# Altium PCB MCU.PcbDoc
Units mm, origin at the board's own origin, x right, y up, seen from the top; angles counter-clockwise.
Board outline 86.23 x 44.32 mm, 2 copper layers (Top Layer, Bottom Layer); 39 components, 73 nets, 241 pads, 41 vias.
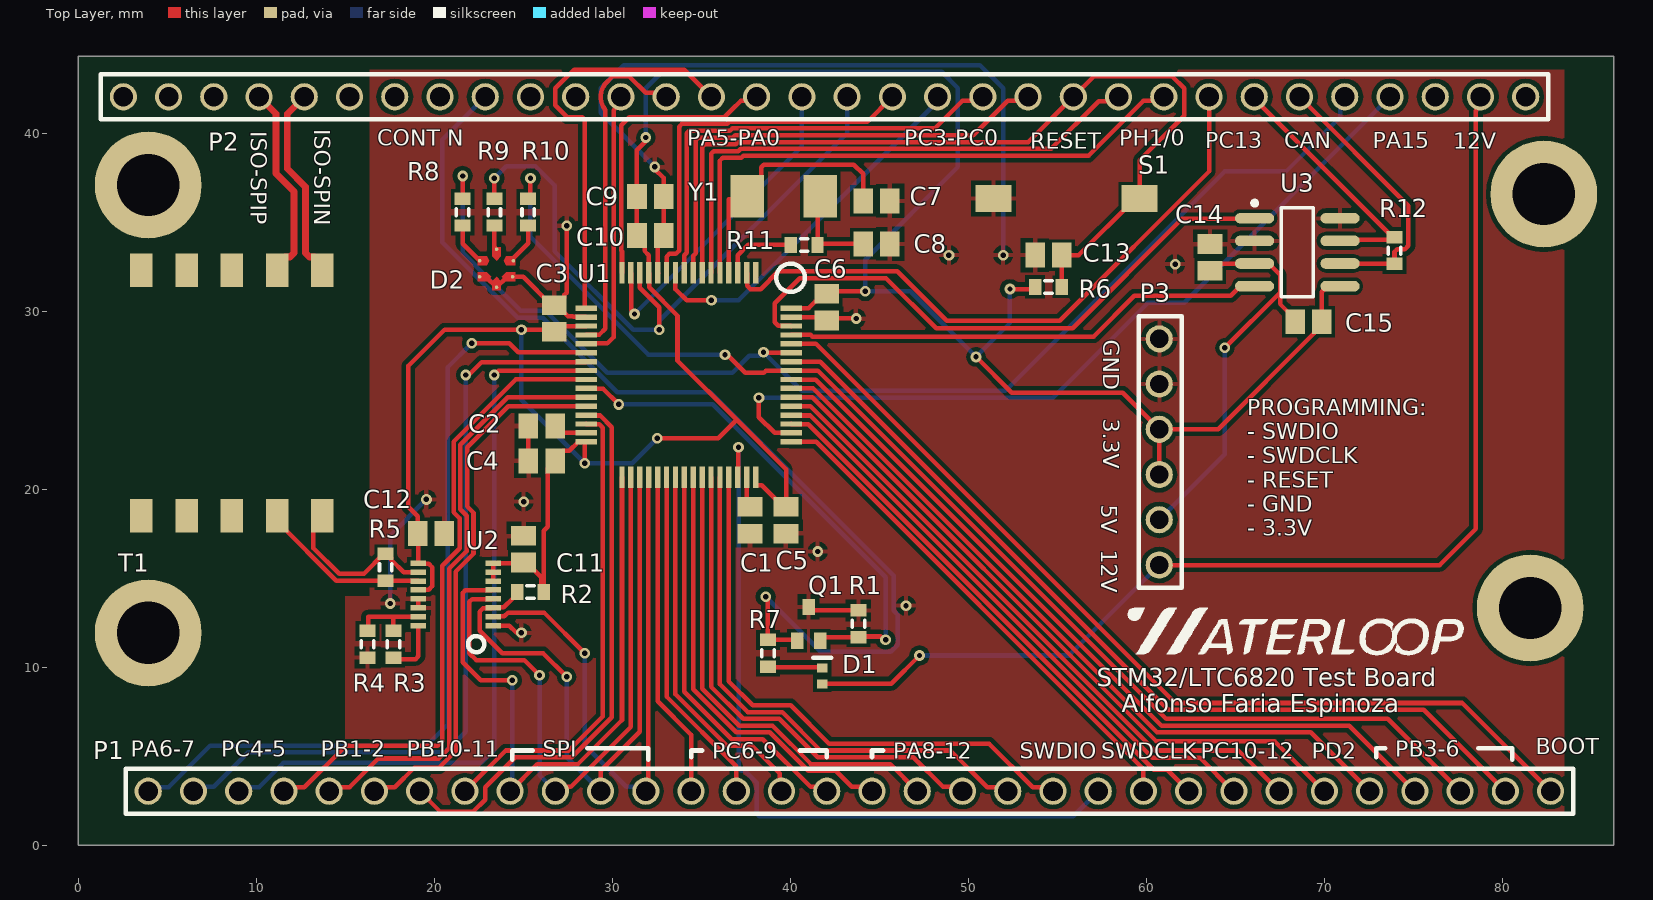
[diagram p0: Top Layer view]
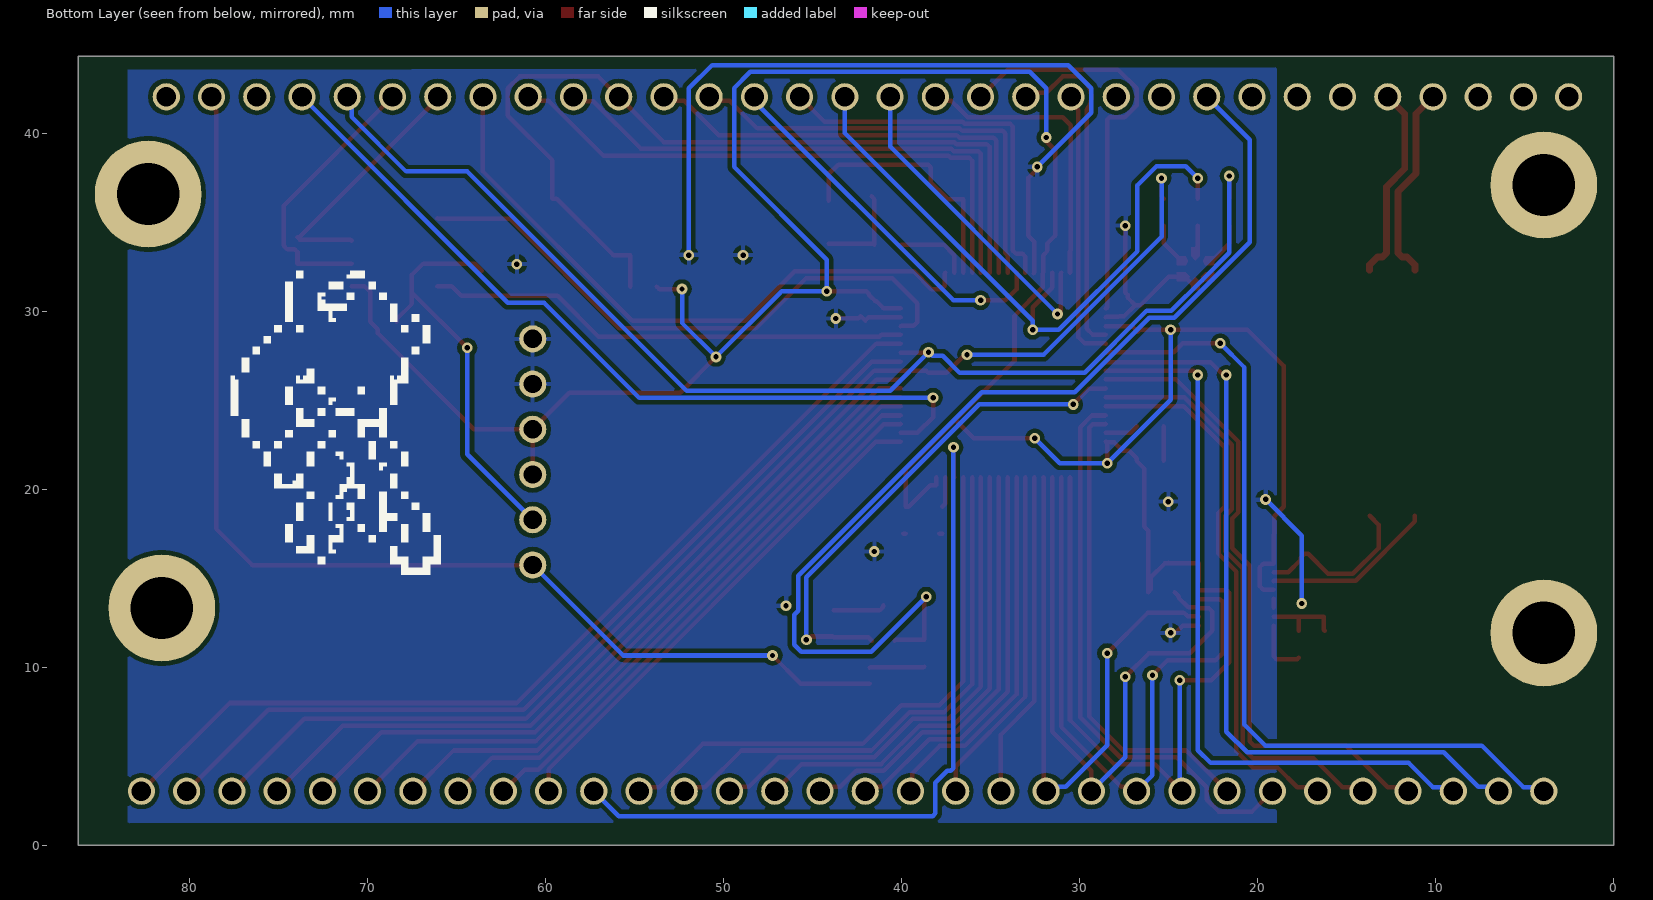
[diagram p1: Bottom Layer view, seen from below]

## Layer stack, top to bottom
Top Solder: solder mask 0.0102, Solder Resist, Dk 3.5
Top Layer: signal copper 0.0356
Dielectric 1: dielectric 0.32, FR-4, Dk 4.8
Bottom Layer: signal copper 0.0356
Bottom Solder: solder mask 0.0102, Solder Resist, Dk 3.5

## Board outline
0,0 86.233,0 86.233,44.323 41.021,44.323 0,44.323

## Design rules (kind name [scope] priority, off if disabled: settings)
Clearance [All] p1: gap=0.254 ignorepadtopadclearanceinfootprint=FALSE except(0: Arc-Hole Track-Hole SMDPad-Hole THPad-Hole Via-Hole Fill-Hole Poly-Hole Region-Hole Text-Hole; 0.127: Arc-Arc Arc-Track Track-Track SMDPad-SMDPad; 0.2: Arc-SMDPad Track-SMDPad SMDPad-Fill SMDPad-Poly SMDPad-Region)
DiffPairsRouting [All] p1: maxlimit=0.254 minlimit=0.254 mostfreqgap=0.254 toplayer_minwidth=0.381 toplayer_maxwidth=0.381 toplayer_prefwidth=0.381 bottomlayer_minwidth=0.381 bottomlayer_maxwidth=0.381 bottomlayer_prefwidth=0.381 maxuncoupledlength=12.7
PolygonConnect [All] p1: connectstyle=Relief reliefconductorwidth=0.254 reliefentries=4 polygonreliefangle="90 Angle" airgapwidth=0.254
RoutingVias [All] p1: holewidth=0.5 width=1 viastyle="Through Hole" minholewidth=0.2 minwidth=0.6 maxholewidth=0.711 maxwidth=1.27
SilkToSolderMaskClearance [IsPad] p1: minsilkscreentomaskgap=0.15 clearancetoexposedcopper=TRUE
SolderMaskExpansion [All] p1: expansion=0.102 istentingtop=FALSE
Width [All] p1: maxlimit=0.381 minlimit=0.254 preferedwidth=0.381 toplayer_prefwidth=0.254 minimp=50.000000 maximp=50.000000 favimp=50.000000
28 further rules are at their usual default settings.

## Classes and differential pairs
net class PH[0..1]: PH0 PH1
net class PC[0..15]: PC0 PC1 PC2 PC3 PC4 PC5 PC6 PC7 PC8 PC9 PC10 PC11 PC12 PC13 PC14 PC15
net class PB[1..11]: PB1 PB2 PB3 PB4 PB5 PB6 PB7 PB8 PB9 PB10 PB11
net class PA[0..15]: PA0 PA1 PA2 PA3 PA4 PA5 PA6 PA7 PA8 PA9 PA10 PA11 PA12 PA13 PA14 PA15
component class STM32: C1 C2 C3 C4 C5 C6 C7 C8 C9 C10 C14 C15 D2 R8 R9 R10 R11 R12 U1 Y1
component class SPI->ISO_SPI: C11 C12 R2 R3 R4 R5 T1 U2
component class "MOSFET Control": D1 Q1 R1 R7
component class Connectors: C13 P1 P2 P3 R6 S1
differential pair ISO-SPI: +ISO-SPI_P -ISO-SPI_N

## Components (designator, comment, footprint, x,y, rotation, side; value= is the part's Value field where it differs from the comment)
C1 "10V" C0805 37.719,18.26 r90 top value=2.2uF
C2 "10V" C0805 26.035,23.544 r0 top value=2.2uF
C3 "10V" C0805 26.734,29.591 r90 top value=100nF
C4 "10V" C0805 26.035,21.59 r180 top value=100nF
C5 "10V" C0805 39.751,18.26 r270 top value=100nF
C6 "10V" C0805 42.037,30.226 r270 top value=100nF
C7 "50V" C0805 44.831,36.195 r180 top value=4pF
C8 "50V" C0805 44.831,33.782 r180 top value=4pF
C9 "10V" C0805 32.131,36.449 r0 top value=10nF
C10 "10V" C0805 32.131,34.241 r180 top value=1uF
C11 "10V" C0805 25.019,16.637 r90 top value=10nF
C12 "10V" C0805 19.812,17.526 r0 top value=10nF
C13 "10V" C0805 54.483,33.147 r180 top value=100nF
C14 "10V" C0805 63.557,33.022 r90 top value=100nF
C15 "10V" C0805 69.088,29.407 r180 top value=100nF
D1 "SMLP13BC8TT86" SMLP13BC8TT86 41.783,9.525 r0 top
D2 "CL-340T-SD-T" CL-340T-SD-T 23.495,32.385 r0 top
P1 "61303211121" 61303211121 3.937,3.048 r0 top
P2 "61303211121" 61303211121 2.54,42.037 r0 top
P3 "PH1-06-UA" PH1-06-UA 60.706,28.448 r270 top
Q1 "NVS4409NT1G" NVS4409NT1G 41.021,12.446 r180 top
R1 "5%" J1-0603 43.815,12.446 r270 top value=10K
R2 "1%" J1-0603 25.4,14.224 r0 top value=3k
R3 "1%" J1-0603 17.703,11.303 r90 top value=3K
R4 "1%" J1-0603 16.248,11.303 r270 top value=1K
R5 "1%" J1-0603 17.272,15.621 r90 top value=120
R6 "5%" J1-0603 54.483,31.369 r180 top value=10K
R7 "5%" J1-0603 38.735,10.795 r270 top value=2K
R8 "1%" J1-0603 21.59,35.56 r90 top value=120R
R9 "1%" J1-0603 23.368,35.56 r90 top value=120R
R10 "1%" J1-0603 25.273,35.56 r90 top value=120R
R11 "0603" J1-0603 40.767,33.722 r0 top value=0
R12 "1%" J1-0603 73.914,33.401 r90 top value=120R
S1 "PTS636 SM43 SMTR LFS" "PTS636 SM43 SMTR LFS" 55.499,36.322 r180 top
T1 "HM2100NLT" HM2100NLT 8.636,25.4 r0 top
U1 "STM32F405RGT6TR" STM32F405RGT6TR 34.29,26.416 r180 top
U2 "LTC6820" LTC6820 21.209,14.097 r90 top
U3 "TJA1051T/3/CM,118" SO8_N 68.461,33.311 r0 top
Y1 "CX5032GB08000H0HPQZ1" CX5032GB08000H0HPQZ1 39.624,36.449 r180 top

## Footprints (in the part's own frame and the unit in brackets; to place one, negate y for a bottom-side part, rotate by r counter-clockwise, add the part's x,y. Pads: shape width x height; smd on the part's side, far side on the other; paste and mask are expansions set on the pad)
61303211121 [mil]
  round 60 hole 43.31: 1(0,0) 2(100,0) 3(200,0) 4(300,0) 5(400,0) 6(500,0) 7(600,0) 8(700,0) 9(800,0) 10(900,0) 11(1000,0) 12(1100,0) 13(1200,0) 14(1300,0) 15(1400,0) 16(1500,0) 17(1600,0) 18(1700,0) 19(1800,0) 20(1900,0) 21(2000,0) 22(2100,0) 23(2200,0) 24(2300,0) 25(2400,0) 26(2500,0) 27(2600,0) 28(2700,0) 29(2800,0) 30(2900,0) 31(3000,0) 32(3100,0)
  silkscreen extent -50,-50 3150,50
C0805 [mm] "Chip Capacitor, Body 2.0x1.3mm, IPC High Density"
  rect 1.1x1.4 smd: 1(-0.75,0) 2(0.75,0)
  body extent -1.1,-0.72 1.1,0.72, height 1.4
CL-340T-SD-T [mm]
  round 0.2 smd: 1(-0.95,0.45) 2(0,1.1) 3(0.95,0.45) 4(0.9,-0.45) 5(0,-1.05) 6(-0.95,-0.45)
  Top Layer region: 1.05,0.2 0.55,0.2 0.4,0.45 0.55,0.7 1.05,0.7
  Top Layer region: -1.05,0.7 -0.55,0.7 -0.4,0.45 -0.55,0.2 -1.05,0.2
  Top Layer region: 1.05,-0.7 0.55,-0.7 0.3,-0.45 0.55,-0.2 1.05,-0.2
  Top Layer region: -1.05,-0.2 -0.55,-0.2 -0.3,-0.45 -0.55,-0.7 -1.05,-0.7
  Top Layer region: -0.25,-1.2 -0.25,-0.7 0,-0.45 0.25,-0.7 0.25,-1.2
  Top Layer region: 0.25,1.2 0.25,0.7 0,0.45 -0.25,0.7 -0.25,1.2
  Top Layer region: 1.778,0
  Top Layer region: 1.143,0.254
  silkscreen extent -0.38,1.27 -0.38,1.27, body extent -0.75,-0.8 0.65,0.9, height 0.35
CX5032GB08000H0HPQZ1 [mm]
  rect 1.9x2.4 smd: 1(-2.05,0) 2(2.05,0)
  body extent -2.5,-1.6 2.5,1.6, height 1.1
HM2100NLT [mm]
  rect 1.27x1.89 smd: 1(-5.08,-6.895) 2(-2.54,-6.895) 3(0,-6.895) 4(2.54,-6.895) 5(5.08,-6.895) 6(5.08,6.895) 7(2.54,6.895) 8(0,6.895) 9(-2.54,6.895) 10(-5.08,6.895)
  body extent -7.37,-5.84 7.37,5.84, height 3.45
J1-0603 [mm] "Chip Resistor, Body 1.6x0.8mm, IPC High Density"
  rect 0.7x0.9 smd: 1(-0.75,0) 2(0.75,0)
  silkscreen extent -0.2,-0.35 0.2,0.35, body extent -0.85,-0.48 0.85,0.48, height 0.9
LTC6820 [mm]
  rect 0.305x0.889 smd: 1(-1.75,-2.106) 2(-1.25,-2.106) 3(-0.75,-2.106) 4(-0.25,-2.106) 5(0.25,-2.106) 6(0.75,-2.106) 7(1.25,-2.106) 8(1.75,-2.106) 9(1.75,2.106) 10(1.25,2.106) 11(0.75,2.106) 12(0.25,2.106) 13(-0.25,2.106) 14(-0.75,2.106) 15(-1.25,2.106) 16(-1.75,2.106)
  silkscreen extent -3.25,-1.6 -2.34,-0.69, body extent -2.03,-1.52 2.03,1.52, height 1.1
NVS4409NT1G [mm]
  rect 0.7x0.9 smd: 1(0.65,0.95) 2(-0.65,0.95) 3(0,-0.95)
  body extent -1.05,-0.62 1.05,0.62, height 0.9
PH1-06-UA [mil]
  round 60 hole 40.16: 1(0,0) 2(100,0) 3(200,0) 4(300,0) 5(400,0) 6(500,0)
  silkscreen extent -50,-45 550,50
"PTS636 SM43 SMTR LFS" [mm]
  rect 2x1.5 smd: 1(-4.1,0) 2(4.1,0)
  body extent -3,-1.75 3,2.85, height 4.3
SMLP13BC8TT86 [mm]
  rect 0.6x0.5 smd: 1(0,-0.45) 2(0,0.45)
  silkscreen extent -0.51,1.02 0.51,1.02, body extent -0.3,-0.5 0.3,0.5, height 0.2
SO8_N [mm] "SOIC, 8-Leads, Body 4.9x3.9mm, Pitch 1.27mm, IPC Medium Density"
  oval 2.2x0.6 smd: 1(-2.4,1.905) 2(-2.4,0.635) 3(-2.4,-0.635) 4(-2.4,-1.905) 5(2.4,-1.905) 6(2.4,-0.635) 7(2.4,0.635) 8(2.4,1.905)
  silkscreen extent -2.52,-2.5 0.9,2.88, body extent -2,-2.5 2,2.5, height 1.75
STM32F405RGT6TR [mm]
  rect 0.3x1.2 smd: 1(-3.75,-5.75) 2(-3.25,-5.75) 3(-2.75,-5.75) 4(-2.25,-5.75) 5(-1.75,-5.75) 6(-1.25,-5.75) 7(-0.75,-5.75) 8(-0.25,-5.75) 9(0.25,-5.75) 10(0.75,-5.75) 11(1.25,-5.75) 12(1.75,-5.75) 13(2.25,-5.75) 14(2.75,-5.75) 15(3.25,-5.75) 16(3.75,-5.75) 33(3.75,5.75) 34(3.25,5.75) 35(2.75,5.75) 36(2.25,5.75) 37(1.75,5.75) 38(1.25,5.75) 39(0.75,5.75) 40(0.25,5.75) 41(-0.25,5.75) 42(-0.75,5.75) 43(-1.25,5.75) 44(-1.75,5.75) 45(-2.25,5.75) 46(-2.75,5.75) 47(-3.25,5.75) 48(-3.75,5.75)
  rect 1.2x0.3 smd: 17(5.75,-3.75) 18(5.75,-3.25) 19(5.75,-2.75) 20(5.75,-2.25) 21(5.75,-1.75) 22(5.75,-1.25) 23(5.75,-0.75) 24(5.75,-0.25) 25(5.75,0.25) 26(5.75,0.75) 27(5.75,1.25) 28(5.75,1.75) 29(5.75,2.25) 30(5.75,2.75) 31(5.75,3.25) 32(5.75,3.75) 49(-5.75,3.75) 50(-5.75,3.25) 51(-5.75,2.75) 52(-5.75,2.25) 53(-5.75,1.75) 54(-5.75,1.25) 55(-5.75,0.75) 56(-5.75,0.25) 57(-5.75,-0.25) 58(-5.75,-0.75) 59(-5.75,-1.25) 60(-5.75,-1.75) 61(-5.75,-2.25) 62(-5.75,-2.75) 63(-5.75,-3.25) 64(-5.75,-3.75)
  silkscreen extent -6.52,-6.26 -4.92,-4.66, body extent -4.83,-4.89 4.83,4.89, height 1.6

## Part data
C1 C2: library part Cap, "C0805C225K8RACAUTO. 2.2µF ±10% 10V Ceramic Capacitor X7R 0805 (2012 Metric)", LatestRevisionDate=17-Jul-2002, LatestRevisionNote="Re-released for DXP Platform.", PackageDescription="Radial Cap, Thru-Hole; 2 Leads; 0.3 in Pin Spacing", PackageReference=RAD-0.3, Published=8-Jun-2000, Publisher="Altium Limited"
C3 C4 C5 C6 C13 C14 C15: library part Cap, "C0805C104K8RACTU. 0.1µF ±10% 10V Ceramic Capacitor X7R 0805 (2012 Metric)", LatestRevisionDate=17-Jul-2002, LatestRevisionNote="Re-released for DXP Platform.", PackageDescription="Radial Cap, Thru-Hole; 2 Leads; 0.3 in Pin Spacing", PackageReference=RAD-0.3, Published=8-Jun-2000, Publisher="Altium Limited"
C7: library part Cap, "CBR08C409B5GAC. 4pF ±0.1pF 50V Ceramic Capacitor C0G, NP0 0805 (2012 Metric)", LatestRevisionDate=17-Jul-2002, LatestRevisionNote="Re-released for DXP Platform.", PackageDescription="Radial Cap, Thru-Hole; 2 Leads; 0.3 in Pin Spacing", PackageReference=RAD-0.3, Published=8-Jun-2000, Publisher="Altium Limited"
C8: library part Cap, "CBR08C409B5GAC", LatestRevisionDate=17-Jul-2002, LatestRevisionNote="Re-released for DXP Platform.", PackageDescription="Radial Cap, Thru-Hole; 2 Leads; 0.3 in Pin Spacing", PackageReference=RAD-0.3, Published=8-Jun-2000, Publisher="Altium Limited"
C9 C11 C12: library part Cap, "C0805C103K8RAC7800. 10000pF ±10% 10V Ceramic Capacitor X7R 0805 (2012 Metric)", LatestRevisionDate=17-Jul-2002, LatestRevisionNote="Re-released for DXP Platform.", PackageDescription="Radial Cap, Thru-Hole; 2 Leads; 0.3 in Pin Spacing", PackageReference=RAD-0.3, Published=8-Jun-2000, Publisher="Altium Limited"
C10: library part Cap, "CL21B105KPFNNNE. 1µF ±10% 10V Ceramic Capacitor X7R 0805 (2012 Metric)", LatestRevisionDate=17-Jul-2002, LatestRevisionNote="Re-released for DXP Platform.", PackageDescription="Radial Cap, Thru-Hole; 2 Leads; 0.3 in Pin Spacing", PackageReference=RAD-0.3, Published=8-Jun-2000, Publisher="Altium Limited"
D1: library part LED2, "Blue 470nm LED Indication - Discrete 2.9V 2-SMD, No Lead", LatestRevisionDate=17-Jul-2002, LatestRevisionNote="Re-released for DXP Platform.", PackageDescription="SM LED; 2 Flat Leads", PackageReference=3.2X1.6X1.1, PackageVersion=Feb-2002, Published=8-Jun-2000, Publisher="Altium Limited"
P3: library part "Header 6", "Connector Header Through Hole 6 position 0.100\" (2.54mm)", LatestRevisionDate=17-Jul-2002, LatestRevisionNote="Re-released for DXP Platform.", Publisher="Altium Limited"
Q1: library part MOSFET-N, "N-Channel 25V 700mA (Ta) 280mW (Tj) Surface Mount SC-70-3 (SOT323)", LatestRevisionDate=17-Jul-2002, LatestRevisionNote="Re-released for DXP Platform.", PackageDescription="TO, Flat Index; 3 In-Line, Axial Leads; Body Dia. 4.6mm; Lead Dia. 0.5 mm (max)", PackageReference=E3, PackageVersion=1995/1996, Published=8-Jun-2000, Publisher="Altium Limited"
R1 R6: library part Res1, "ERJ-3GEYJ103V. 10 kOhms ±5% 0.1W, 1/10W Chip Resistor 0603 (1608 Metric) Automotive AEC-Q200 Thick Film", LatestRevisionDate=17-Jul-2002, LatestRevisionNote="Re-released for DXP Platform.", PackageDescription="Axial Device, Thru-Hole; 2 Leads; 0.3 in Pin Spacing", PackageReference=AXIAL-0.3, Published=8-Jun-2000, Publisher="Altium Limited"
R2 R3: library part Res1, "RMCF0603FT3K00. 3 kOhms ±1% 0.1W, 1/10W Chip Resistor 0603 (1608 Metric) Automotive AEC-Q200 Thick Film", LatestRevisionDate=17-Jul-2002, LatestRevisionNote="Re-released for DXP Platform.", PackageDescription="Axial Device, Thru-Hole; 2 Leads; 0.3 in Pin Spacing", PackageReference=AXIAL-0.3, Published=8-Jun-2000, Publisher="Altium Limited"
R4: library part Res1, "RC0603FR-071KL .1 kOhms ±1% 0.1W, 1/10W Chip Resistor 0603 (1608 Metric) Moisture Resistant Thick Film", LatestRevisionDate=17-Jul-2002, LatestRevisionNote="Re-released for DXP Platform.", PackageDescription="Axial Device, Thru-Hole; 2 Leads; 0.3 in Pin Spacing", PackageReference=AXIAL-0.3, Published=8-Jun-2000, Publisher="Altium Limited"
R5 R8 R9 R10 R12: library part Res1, "RC0603FR-07120RL. 120 Ohms ±1% 0.1W, 1/10W Chip Resistor 0603 (1608 Metric) Moisture Resistant Thick Film", LatestRevisionDate=17-Jul-2002, LatestRevisionNote="Re-released for DXP Platform.", PackageDescription="Axial Device, Thru-Hole; 2 Leads; 0.3 in Pin Spacing", PackageReference=AXIAL-0.3, Published=8-Jun-2000, Publisher="Altium Limited"
R7: library part Res1, "ERJ-PA3J202V. 2 kOhms ±5% 0.25W, 1/4W Chip Resistor 0603 (1608 Metric) Automotive AEC-Q200, Pulse Withstanding Thick Film", LatestRevisionDate=17-Jul-2002, LatestRevisionNote="Re-released for DXP Platform.", PackageDescription="Axial Device, Thru-Hole; 2 Leads; 0.3 in Pin Spacing", PackageReference=AXIAL-0.3, Published=8-Jun-2000, Publisher="Altium Limited"
R11: library part Res1, "ERJ-U030R00V. 0 Ohms Jumper 0.1W, 1/10W Chip Resistor 0603 (1608 Metric) Anti-Sulfur, Automotive AEC-Q200 Thick Film", LatestRevisionDate=17-Jul-2002, LatestRevisionNote="Re-released for DXP Platform.", PackageDescription="Axial Device, Thru-Hole; 2 Leads; 0.3 in Pin Spacing", PackageReference=AXIAL-0.3, Published=8-Jun-2000, Publisher="Altium Limited"
S1: library part SW-PB, "Tactile Switch SPST-NO Top Actuated Surface Mount", LatestRevisionDate=17-Jul-2002, LatestRevisionNote="Re-released for DXP Platform.", PackageDescription="Switch; 2 Leads", PackageReference=SPST-2, Published=24-Mar-1999, Publisher="Altium Limited"
U3: library part TJA1050T/CM,118
Y1: library part XTAL, "8MHz ±20ppm Crystal 12pF 300 Ohms 2-SMD, No Lead", LatestRevisionDate=17-Jul-2002, LatestRevisionNote="Re-released for DXP Platform.", PackageDescription="Crystal, Thru-Hole; 2 Leads; Body 3.1 x 8.2 mm (Dia.xH)", PackageReference=R38, Published=8-Jun-2000, Publisher="Altium Limited"

## Free pads (board coordinates)
  round 6 hole 3.5 unplated: 12(3.937,37.084) 13(3.937,11.938) 14(82.296,36.576) 15(81.534,13.335)

## Via types
v1: diameter 0.6, hole 0.3, Top Layer to Bottom Layer, 41 vias

## Nets (pads, with @x,y where several pads share a name; then routed paths per layer and width w, separated by ;. In a path a pad name is that pad's centre, name@x,y a point inside that pad or via, vN(x,y) a via of type N, cw(c..) or ccw(c..) an arc to the next point about the centre after c; other vN are vias at no path point)
3V3: C3.1 C4.1 C5.1 C6.1 C9.1 C10.2 C11.1 C12.1 C15.1 P3.3 P3.4 R2.2 R6.2 U1.13 U1.19 U1.32 U1.48 U1.64 U2.6 U2.7 U2.8 U2.9 U2.12 U3.5 | length 169
  Top Layer w0.254: U2.12 19.123,14.367 19.683,14.367 19.874,14.559 19.874,15.635 19.683,15.827 19.123,15.827 U2.9 19.103,17.485 C12.1 19.062,18.49 18.542,19.01 18.542,26.924 20.574,28.956 v1(24.892,28.956) 26.619,28.956 C3.1 27.059,29.166 U1.19 ; U2.6 U2.7 U2.8 C11.1@25.209,15.847 ; C11.1 25.059,15.847 C11.1@25.209,15.847 ; v1(28.448,21.463) 28.448,22.643 U1.32@28.471,22.666 ; U1.32 28.517,22.643 28.067,22.643 27.587,22.163 27.208,22.163 26.785,21.74 C4.1 26.362,21.167 26.362,17.888 26.15,17.676 R2.2 26.001,14.373 26.001,15.055 C11.1@25.209,15.847 ; v1(31.877,39.751) 31.877,39.549 31.369,39.041 31.369,37.679 31.381,37.667 C9.1 C10.2 31.804,33.818 31.804,33.383 32.04,33.147 U1.13 32.063,32.143 32.063,31.341 33.655,29.749 33.655,27.218 36.977,23.896 ; v1(32.512,22.86) 35.941,22.86 36.977,23.896 ; U1.48 38.04,20.251 38.063,20.228 38.383,20.228 39.601,19.01 C5.1 39.751,21.122 36.977,23.896 ; U1.64 41.015,30.166 41.402,30.553 41.464,30.553 41.837,30.926 41.837,30.988 41.964,31.115 v1(44.196,31.115) ; v1(50.419,27.432) 52.427,25.424 58.65,25.424 P3.3 ; v1(52.324,31.242) 53.606,31.242 R6.2 ; P3.4 P3.3 ; U3.5 70.155,31.406 69.838,31.089 C15.1 69.415,28.984 69.415,28.771 64.012,23.368 P3.3
  Bottom Layer w0.254: v1(24.892,28.956) 24.892,25.019 v1(28.448,21.463) 31.115,21.463 v1(32.512,22.86) ; v1(31.877,39.751) 31.877,42.51 32.801,43.434 48.492,43.434 49.403,42.523 49.403,38.1 44.196,32.893 v1(44.196,31.115) 46.736,31.115 46.863,30.988 v1(50.419,27.432) 52.324,29.337 v1(52.324,31.242)
5V: C14.1 C15.2 P3.5 U3.3 | length 23.1
  Top Layer w0.254: C14.1 63.961,32.676 U3.3 66.861,32.676 67.488,32.049 67.488,31.039 ; v1(64.389,27.94) 67.488,31.039 ; C15.2 68.338,29.557 67.488,30.407 67.488,31.039
  Bottom Layer w0.254: P3.5 60.96,18.288 60.96,18.542 64.389,21.971 v1(64.389,27.94)
12V: D1.1 P2.31 P3.6 | length 64.7
  Top Layer w0.254: D1.1 45.651,9.075 v1(47.244,10.668) ; P3.6 76.454,15.748 78.486,17.78 78.486,41.253 78.497,41.264 78.497,41.794 P2.31
  Bottom Layer w0.254: v1(47.244,10.668) 55.626,10.668 P3.6
BOOT: P1.32 U1.60 | length 53
  Top Layer w0.254: U1.60 41.43,28.166 61.595,8.001 77.724,8.001 P1.32
CAN_RX: U1.61 U3.4 | length 27.2
  Top Layer w0.254: U1.61 41.135,28.666 41.226,28.575 57.023,28.575 59.309,30.861 64.716,30.861 65.261,31.406 U3.4
CAN_TX: U1.62 U3.1 | length 33.3
  Top Layer w0.254: U1.62 40.017,29.189 39.305,29.189 39.113,29.381 39.113,30.451 40.515,31.853 45.363,31.853 48.174,29.042 55.839,29.042 61.976,35.179 66.024,35.179 U3.1
CONT_N: P2.9 Q1.1 R7.1 | length 59.2
  Top Layer w0.254: v1(38.608,13.97) 38.608,13.876 38.735,13.749 R7.1 40.322,11.545 Q1.1
  Bottom Layer w0.254: P2.9 20.447,39.624 20.447,33.878 24.688,29.637 26.085,29.637 30.276,25.446 35.492,25.446 45.801,15.137 45.801,13.18 46.02,12.961 46.02,11.275 45.621,10.876 41.702,10.876 v1(38.608,13.97)
GND: C1.1 C2.1 C3.2 C4.2 C5.2 C6.2 C7.1 C8.1 C9.2 C10.1 C11.2 C12.2 C13.2 C14.2 D2.4 D2.5 D2.6 P3.1 P3.2 Q1.3 R1.1 R4.2 S1.2 U1.12 U1.18 U1.63 U2.1 U2.13 U2.14 U3.2 U3.8 | length 75.2
  Top Layer w0.254: U2.14 U2.13 ; D2.6 22.895,31.935 D2.5 24.095,31.935 D2.4 24.99,31.935 26.584,30.341 C3.2 C3.2@26.884,30.341 ; U2.1 24.208,12.347 24.617,11.938 v1(24.892,11.938) ; C4.2 C2.1 ; v1(27.432,34.798) 27.432,31.039 27.307,30.914 27.307,30.764 C3.2@26.884,30.341 ; U1.18 28.517,29.689 27.805,29.689 27.776,29.718 27.507,29.718 C3.2@26.884,30.341 ; v1(32.385,38.1) 32.385,37.978 32.881,37.482 C9.2 C10.1 32.54,33.9 U1.12 U1.12@32.563,32.143 ; C1.1 C1.1@37.869,17.51 ; C5.2 C5.2@39.901,17.51 ; U1.63 41.847,29.666 C6.2 42.279,29.718 42.406,29.591 v1(43.688,29.591) ; Q1.3@41.021,13.496 Q1.3 41.221,13.196 R1.1
  Bottom Layer w0.254: v1(17.526,13.589) 17.526,17.399 v1(19.558,19.431) ; v1(32.385,38.1) 29.337,41.148 29.337,42.51 30.642,43.815 50.638,43.815 51.943,42.51 v1(51.943,33.147)
  other v1: 46.482,13.462 41.529,16.51 25.019,19.304 61.595,32.639 48.895,33.147
ISO-SPI_N: P2.5 T1.6 | length 11.1
  Top Layer w0.381: P2.5 11.747,41.084 11.747,37.997 12.763,36.981 12.763,33.273 12.987,33.049 13.271,33.049 13.716,32.605 T1.6
ISO-SPI_P: P2.4 T1.7 | length 11.1
  Top Layer w0.381: P2.4 11.112,41.084 11.112,37.734 12.128,36.718 12.128,33.273 11.905,33.049 11.62,33.049 11.176,32.605 T1.7
NetC1_2: C1.2 U1.47 | length 1.7
  Top Layer w0.254: U1.47 37.54,19.189 C1.2
NetC2_2: C2.2 U1.31 | length 1.9
  Top Layer w0.254: C2.2 27.163,23.166 U1.31
NetC7_2: C7.2 U1.4 Y1.2 | length 14.7
  Top Layer w0.254: U1.4 36.54,36.286 37.411,36.286 Y1.2 38.354,37.229 38.354,38.078 38.503,38.227 43.561,38.227 44.081,37.707 C7.2
NetC8_2: C8.2 R11.2 Y1.1 | length 5.4
  Top Layer w0.254: Y1.1 41.517,36.292 R11.2 41.577,33.782 C8.2
NetC13_1: C13.1 P2.22 R6.1 S1.1 U1.7 | length 50.7
  Top Layer w0.254: U1.7 35.04,33.071 35.052,33.083 35.052,39.221 35.201,39.37 36.917,39.37 37.044,39.497 53.34,39.497 P2.22 57.023,43.18 61.433,43.18 62.103,42.51 62.103,40.98 59.599,38.476 S1.1 59.349,36.322 56.174,33.147 C13.1 R6.1
NetD1_2: D1.2 R7.2 | length 3.1
  Top Layer w0.254: R7.2 38.77,10.01 41.748,10.01 D1.2
NetD2_1: D2.1 R8.1 | length 2.4
  Top Layer w0.254: R8.1 21.59,33.79 D2.1
NetD2_2: D2.2 R9.1 | length 1.4
  Top Layer w0.254: R9.1 23.368,33.612 D2.2
NetD2_3: D2.3 R10.1 | length 2.3
  Top Layer w0.254: 24.37,32.91 25.273,33.813 R10.1
NetP1_9: P1.9 U1.33 U2.5 | length 36.8
  Top Layer w0.254: U2.5 23.295,14.327 21.739,14.327 21.59,14.178 21.59,10.287 22.606,9.271 v1(24.384,9.271) ; P1.9 25.781,4.572 28.067,4.572 30.54,7.045 U1.33
  Bottom Layer w0.254: P1.9 24.13,3.175 24.384,3.429 v1(24.384,9.271)
NetP1_10: P1.10 U1.34 U2.4 | length 35.4
  Top Layer w0.254: U2.4 23.295,13.827 22.12,13.827 21.971,13.678 21.971,10.795 22.352,10.414 25.045,10.414 v1(25.908,9.551) ; P1.10 27.034,3.285 27.669,3.285 31.04,6.656 U1.34
  Bottom Layer w0.254: v1(25.908,9.551) 25.908,3.937 P1.10
NetP1_11: P1.11 R2.1 U1.35 U2.3 | length 35.4
  Top Layer w0.254: R2.1 24.427,14.001 24.427,13.9 23.895,13.367 23.336,13.367 U2.3 23.295,13.327 22.735,13.327 22.544,13.135 22.544,12.059 23.808,10.795 26.105,10.795 v1(27.432,9.468) ; P1.11 29.337,4.191 31.54,6.394 U1.35
  Bottom Layer w0.254: v1(27.432,9.468) 27.432,4.953 P1.11
NetP1_12: P1.12 U1.36 U2.2 | length 33.5
  Top Layer w0.254: U2.2 23.335,12.867 23.934,12.867 24.147,13.081 26.162,13.081 v1(28.448,10.795) ; P1.12 32.017,3.188 32.017,20.643 U1.36
  Bottom Layer w0.254: v1(28.448,10.795) 28.448,5.625 30.782,3.291 31.634,3.291 P1.12
NetQ1_2: Q1.2 R1.2 U1.26 | length 28.5
  Top Layer w0.254: U1.26 28.563,25.643 29.475,25.643 v1(30.353,24.765) ; Q1.2 41.871,11.696 R1.2 43.854,11.735 45.068,11.735 45.245,11.557 v1(45.339,11.557)
  Bottom Layer w0.254: v1(30.353,24.765) 35.634,24.765 45.339,15.06 v1(45.339,11.557)
NetR3_1: R3.1 U2.16 | length 3.2
  Top Layer w0.254: R3.1 17.789,10.467 18.954,10.467 19.103,10.616 U2.16
NetR3_2: R3.2 R4.1 U2.15 | length 4.4
  Top Layer w0.254: R4.1 16.298,12.102 16.298,12.847 17.7,12.847 ; R3.2 17.7,12.055 17.7,12.847 ; U2.15 17.7,12.847
NetR5_1: R5.1 T1.4 U2.11 | length 9.6
  Top Layer w0.254: T1.4 11.176,18.195 14.5,14.871 R5.1 17.284,14.859 19.091,14.859 U2.11
NetR5_2: R5.2 T1.5 U2.10 | length 9.4
  Top Layer w0.254: T1.5 13.208,17.997 13.208,16.702 14.658,15.252 16.053,15.252 17.172,16.371 R5.2 ; R5.2@17.372,16.371 17.595,16.148 17.595,16.03 18.277,15.347 U2.10
NetR11_1: R11.1 U1.3 | length 4.2
  Top Layer w0.254: U1.3 37.04,33.147 37.615,33.722 R11.1
PA0: P2.17 R9.2 U1.14 | length 37.8
  Top Layer w0.254: R9.2 v1(23.368,37.465) ; U1.14 31.54,31.325 32.639,30.226 v1(32.639,28.956)
  Bottom Layer w0.254: v1(23.368,37.465) 24.049,38.146 25.682,38.146 26.751,37.077 26.751,33.373 31.168,28.956 v1(32.639,28.956) 32.639,29.464 43.18,40.005 P2.17
PA1: P2.16 U1.15 | length 18.5
  Top Layer w0.254: U1.15 31.063,32.143 31.063,30.024 v1(31.242,29.845)
  Bottom Layer w0.254: v1(31.242,29.845) 40.64,39.243 P2.16
PA2: P2.15 U1.16 | length 16.5
  Top Layer w0.254: U1.16 30.54,33.369 30.504,33.405 30.504,40.445 30.953,40.894 36.286,40.894 36.667,41.275 36.676,41.275 37.218,41.818 37.881,41.818 P2.15
PA3: P2.14 U1.17 | length 23.4
  Top Layer w0.254: U1.17 28.471,30.166 28.448,30.189 28.448,40.745 28.299,40.894 27.467,40.894 26.797,41.564 26.797,42.51 27.848,43.561 34.036,43.561 P2.14
PA4: P2.13 U1.20 | length 19.1
  Top Layer w0.254: U1.20 28.563,28.689 29.275,28.689 29.591,29.005 29.591,41.319 cw(c30.48,42.037) 29.591,42.755 29.591,42.764 30.007,43.18 30.953,43.18 31.877,42.256 32.801,42.256 P2.13
PA5: P2.12 U1.21 | length 15.3
  Top Layer w0.254: U1.21 28.563,28.189 29.713,28.189 30.063,28.539 30.063,41.276 30.48,41.693 P2.12
PA6: P1.1 U1.22 | length 47
  Top Layer w0.254: v1(22.098,28.194) 24.212,28.194 24.72,27.686 28.52,27.686 U1.22
  Bottom Layer w0.254: P1.1 4.156,3.267 5.08,3.267 7.422,5.61 19.58,5.61 20.745,6.775 20.745,26.841 v1(22.098,28.194)
PA7: P1.2 U1.23 | length 43.8
  Top Layer w0.254: v1(21.761,26.416) 21.931,26.416 22.658,27.143 28.517,27.143 U1.23
  Bottom Layer w0.254: P1.2 6.72,3.291 7.609,3.291 9.547,5.229 20.596,5.229 21.761,6.394 v1(21.761,26.416)
PA8: P1.17 U1.41 | length 24.3
  Top Layer w0.254: U1.41 34.54,8.767 36.957,6.35 38.831,6.35 40.99,4.191 42.545,4.191 43.445,3.291 44.334,3.291 P1.17
PA9: P1.18 U1.42 | length 26.3
  Top Layer w0.254: U1.42 35.04,8.806 37.115,6.731 38.989,6.731 41.148,4.572 45.593,4.572 P1.18
PA10: P1.19 U1.43 | length 28.3
  Top Layer w0.254: U1.43 35.54,8.91 37.338,7.112 39.37,7.112 41.529,4.953 46.9,4.953 48.562,3.291 49.414,3.291 P1.19
PA11: P1.20 U1.44 | length 30.3
  Top Layer w0.254: U1.44 36.04,9.045 37.592,7.493 39.528,7.493 41.687,5.334 48.987,5.334 51.054,3.267 51.978,3.267 P1.20
PA12: P1.21 U1.45 | length 32.2
  Top Layer w0.254: U1.45 36.54,9.211 37.877,7.874 40.005,7.874 42.164,5.715 51.146,5.715 53.594,3.267 54.518,3.267 P1.21
PA13: P1.22 U1.46 | length 42.6
  Top Layer w0.254: U1.46 37.062,20.688 37.062,22.33 v1(37.084,22.352)
  Bottom Layer w0.254: v1(37.084,22.352) 37.084,4.34 37.233,4.191 37.43,4.191 38.1,3.521 38.1,1.8 38.249,1.651 55.88,1.651 P1.22
PA14: P1.23 U1.49 | length 28.6
  Top Layer w0.254: U1.49 41.438,22.666 59.817,4.287 P1.23
PA15: P2.29 U1.50 | length 45.7
  Top Layer w0.254: v1(38.227,25.146) 38.227,24.049 39.11,23.166 U1.50
  Bottom Layer w0.254: v1(38.227,25.146) 54.737,25.146 60.071,30.48 62.103,30.48 P2.29
PB1: P1.5 U1.27 | length 33.5
  Top Layer w0.254: P1.5 14.316,3.267 15.24,3.267 16.857,4.884 20.251,4.884 20.828,5.461 20.828,15.541 21.82,16.533 21.82,18.519 21.463,18.876 21.463,22.51 24.119,25.166 U1.27
PB2: P1.6 U1.28 | length 30.8
  Top Layer w0.254: P1.6 16.856,3.267 17.78,3.267 18.889,4.376 20.282,4.376 21.209,5.303 21.209,15.383 22.201,16.375 22.201,18.677 21.844,19.034 21.844,22.352 24.158,24.666 U1.28
PB3: P1.28 U1.55 | length 41.8
  Top Layer w0.254: U1.55 41.263,25.666 60.579,6.35 69.215,6.35 P1.28
PB4: P1.29 U1.56 | length 44.6
  Top Layer w0.254: U1.56 40.063,26.143 41.421,26.143 60.833,6.731 71.374,6.731 P1.29
PB5: P1.30 R10.2 U1.57 | length 69.7
  Top Layer w0.254: R10.2 25.4,36.437 v1(25.4,37.465) ; v1(36.322,27.559) 36.449,27.559 37.465,26.543 38.498,26.543 38.621,26.666 U1.57 41.533,26.666 61.087,7.112 73.533,7.112 P1.30
  Bottom Layer w0.254: v1(25.4,37.465) 25.4,34.185 32.026,27.559 v1(36.322,27.559)
PB6: P1.31 U1.58 | length 50.1
  Top Layer w0.254: U1.58 41.668,27.166 61.214,7.62 75.565,7.62 P1.31
PB7: P2.28 R8.2 U1.59 | length 68.2
  Top Layer w0.254: R8.2 v1(21.59,37.592) ; v1@38.481,27.643 38.514,27.676 40.03,27.676 U1.59
  Bottom Layer w0.254: v1(21.59,37.592) 21.59,33.274 23.114,31.75 24.846,30.018 26.243,30.018 29.718,26.543 36.743,26.543 37.691,27.492 38.287,27.492 v1(38.481,27.686) 40.64,25.527 52.07,25.527 64.389,37.846 67.818,37.846 70.877,40.905 70.877,41.794 P2.28
PB8: P2.26 R12.2 U3.7 | length 14.3
  Top Layer w0.254: P2.26 66.04,41.925 73.814,34.151 R12.2 73.775,34.012 70.927,34.012 U3.7
PB9: P2.27 R12.1 U3.6 | length 15.8
  Top Layer w0.254: P2.27@68.58,41.783 P2.27 74.691,35.926 74.691,33.666 74.499,33.474 74.063,33.474 73.914,33.325 R12.1 73.901,32.664 70.873,32.664 U3.6
PB10: P1.7 U1.29 | length 31.9
  Top Layer w0.254: P1.7 20.32,1.905 22.19,1.905 22.86,2.575 22.86,3.267 24.546,4.953 27.717,4.953 29.972,7.208 29.972,23.485 29.314,24.143 28.563,24.143 U1.29
PB11: P1.8 U1.30 | length 26.7
  Top Layer w0.254: P1.8 24.003,5.334 27.559,5.334 29.467,7.242 29.467,23.451 29.275,23.643 28.563,23.643 U1.30
PC0: P2.21 U1.8 | length 27.2
  Top Layer w0.254: U1.8 34.54,33.11 34.671,33.241 34.671,39.602 34.82,39.751 36.759,39.751 36.886,39.878 50.257,39.878 52.197,41.818 53.121,41.818 P2.21
PC1: P2.20 U1.9 | length 25.4
  Top Layer w0.254: U1.9 34.04,33.148 34.168,33.276 34.168,39.983 34.316,40.132 36.602,40.132 36.729,40.259 48.098,40.259 49.657,41.818 50.581,41.818 P2.20
PC2: P2.19 U1.10 | length 21.3
  Top Layer w0.254: U1.10 33.54,31.236 34.169,30.607 v1(35.56,30.607)
  Bottom Layer w0.254: v1@35.433,30.607 v1(35.56,30.607) 37.084,30.607 48.26,41.783 P2.19 P2.19@48.017,41.794
PC3: P2.18 U1.11 | length 21.4
  Top Layer w0.254: U1.11 33.04,33.065 33.189,33.214 33.566,33.214 33.758,33.405 33.758,40.364 33.907,40.513 36.444,40.513 36.571,40.64 44.323,40.64 P2.18
PC4: P1.3 U1.24 | length 41.6
  Top Layer w0.254: v1(23.368,26.416) 23.595,26.643 28.517,26.643 U1.24
  Bottom Layer w0.254: P1.3 9.236,3.267 10.16,3.267 11.53,4.638 22.65,4.638 23.368,5.356 v1(23.368,26.416)
PC5: P1.4 U1.25 | length 36.3
  Top Layer w0.254: P1.4 11.776,3.267 12.7,3.267 15.021,5.588 20.193,5.588 20.447,5.842 20.447,15.699 21.439,16.691 21.439,18.361 21.082,18.718 21.082,22.668 24.58,26.166 U1.25
PC6: P1.13 U1.37 | length 18.4
  Top Layer w0.254: U1.37 32.54,8.1 34.417,6.223 P1.13
PC7: P1.14 U1.38 | length 19.2
  Top Layer w0.254: U1.38 33.04,8.362 36.957,4.445 P1.14
PC8: P1.15 U1.39 | length 20.9
  Top Layer w0.254: U1.39 33.54,8.497 36.449,5.588 37.846,5.588 39.392,4.042 39.392,3.153 P1.15
PC9: P1.16 U1.40 | length 22.3
  Top Layer w0.254: U1.40 34.04,8.632 36.703,5.969 38.45,5.969 41.134,3.285 41.8,3.285 P1.16
PC10: P1.24 U1.51 | length 30.9
  Top Layer w0.254: U1.51 40.063,23.643 41,23.643 60.389,4.255 61.151,4.255 P1.24
PC11: P1.25 U1.52 | length 33.9
  Top Layer w0.254: U1.52 40.063,24.143 41.104,24.143 60.31,4.938 62.97,4.938 64.86,3.048 P1.25 P1.25@64.678,3.267
PC12: P1.26 U1.53 | length 36.4
  Top Layer w0.254: U1.53 41.12,24.666 60.452,5.334 65.151,5.334 P1.26
PC13: P2.25 U1.2 | length 36
  Top Layer w0.254: U1.2 37.563,32.143 37.563,31.431 37.755,31.239 38.325,31.239 39.32,32.234 40.357,32.234 45.998,32.234 48.768,29.464 55.118,29.464 63.5,37.846 P2.25
PD2: P1.27 U1.54 | length 39.1
  Top Layer w0.254: U1.54 41.224,25.166 60.548,5.842 67.183,5.842 P1.27
PH0: P2.24 U1.5 | length 32.7
  Top Layer w0.254: U1.5 36.04,38.459 36.189,38.608 37.233,38.608 37.36,38.735 56.734,38.735 59.817,41.818 60.741,41.818 P2.24
PH1: P2.23 U1.6 | length 30.9
  Top Layer w0.254: U1.6 35.54,38.84 35.689,38.989 37.075,38.989 37.202,39.116 54.629,39.116 57.307,41.794 58.177,41.794 P2.23
pads on no net: P2.1 P2.2 P2.3 P2.6 P2.7 P2.8 P2.10 P2.11 P2.30 P2.32 T1.1 T1.2 T1.3 T1.8 T1.9 T1.10 U1.1

## Polygon pours and split planes (outlines as drawn)
GND on Bottom Layer "GND_L02_P001" (solid, remove dead copper, pour order 1): 18.923,43.688 18.923,1.27 83.312,1.27 83.439,1.143 83.439,43.561
GND on Top Layer "GND_L01_P000" (solid, remove dead copper, pour order 0): 16.383,43.561 16.383,14 15,14 15,6 16.383,6 16.383,1.778 83.566,1.778 83.439,1.905 83.439,43.561

## Other copper
Bottom Layer:
  region: 102.667,103.251 102.87,103.251 102.87,103.048 102.464,103.048 102.464,103.251 102.464,103.454 102.667,103.454
  region: 204.267,143.078 204.064,143.078 204.064,142.875 203.86,142.875 203.86,142.672 203.657,142.672 203.657,142.875 203.657,143.078 203.86,143.078 203.86,143.281 204.267,143.281
  region: 101.27,98.171 101.473,98.171 101.473,97.968 101.067,97.968 101.067,98.171 101.067,98.374 101.27,98.374
  region: 202.87,137.998 202.667,137.998 202.667,137.795 202.463,137.795 202.463,137.592 202.26,137.592 202.26,137.795 202.26,137.998 202.463,137.998 202.463,138.201 202.87,138.201

## Silkscreen, mask and mechanical layers (free items; w line width, h text height)
Top Overlay:
  drawing of 24 lines, arcs and shapes, not listed
  text "ISO-SPIN" at 13.251,40.216 h0.9 r270
  text "ISO-SPIP" at 9.695,40.089 h0.9 r270
  text "CONT N" at 16.807,39.286 h0.9
  text "PA5-PA0" at 34.206,39.286 h0.9
  text "PC3-PC0" at 46.398,39.286 h0.9
  text "PH1/0" at 58.463,39.286 h0.9
  text "PC13" at 63.289,39.159 h0.9
  text "CAN" at 67.734,39.159 h0.9
  text "PA15" at 72.687,39.159 h0.9
  text "RESET" at 53.467,39.116 h0.9
  text "12V" at 77.216,39.116 h0.9
  text "GND" at 57.574,28.405 h0.9 r270
  text "3.3V" at 57.574,23.96 h0.9 r270
  text "5V" at 57.447,19.134 h0.9 r270
  text "PROGRAMMING: / - SWDIO / - SWDCLK / - RESET / - GND / - 3.3V" at 65.659,17.399 h0.9
  text "12V" at 57.447,16.594 h0.9 r270
  text "STM32/LTC6820 Test Board" at 57.193,8.933 h1
  text "Alfonso Faria Espinoza" at 58.59,7.488 h1
  text "BOOT" at 81.831,5.123 h0.9
  text "PA6-7" at 2.964,4.996 h0.9
  text "PC4-5" at 8.044,4.996 h0.9
  text "PB1-2" at 13.632,4.996 h0.9
  text "PB10-11" at 18.458,4.996 h0.9
  text "SPI" at 26.078,4.996 h0.9
  text "PB3-6" at 73.957,4.996 h0.9
  text "PC6-9" at 35.603,4.869 h0.9
  text "PA8-12" at 45.763,4.869 h0.9
  text "SWDIO" at 52.875,4.869 h0.9
  text "SWDCLK" at 57.447,4.869 h0.9
  text "PC10-12" at 63.035,4.869 h0.9
  text "PD2" at 69.258,4.869 h0.9
Bottom Overlay:
  drawing of 61 lines, arcs and shapes, not listed
Mechanical 1:
  lines w0.025: -0.013,0 ccw(c0,0) 0,-0.013 ; -0.013,0 ccw(c0,0) 0,-0.013 ; -0.013,0 -0.013,44.323 ; -0.013,44.323 cw(c0,44.323) 0,44.336 ; -0.013,44.323 cw(c0,44.323) 0,44.336 ; 0,-0.013 86.233,-0.013 ; 0,44.336 41.021,44.336 86.233,44.336 ; 86.233,-0.013 ccw(c86.233,0) 86.246,0 ; 86.233,-0.013 ccw(c86.233,0) 86.246,0 ; 86.233,44.336 cw(c86.233,44.323) 86.246,44.323 ; 86.233,44.336 cw(c86.233,44.323) 86.246,44.323 ; 86.246,0 86.246,44.323